# Allegro board interconnect_v1.brd
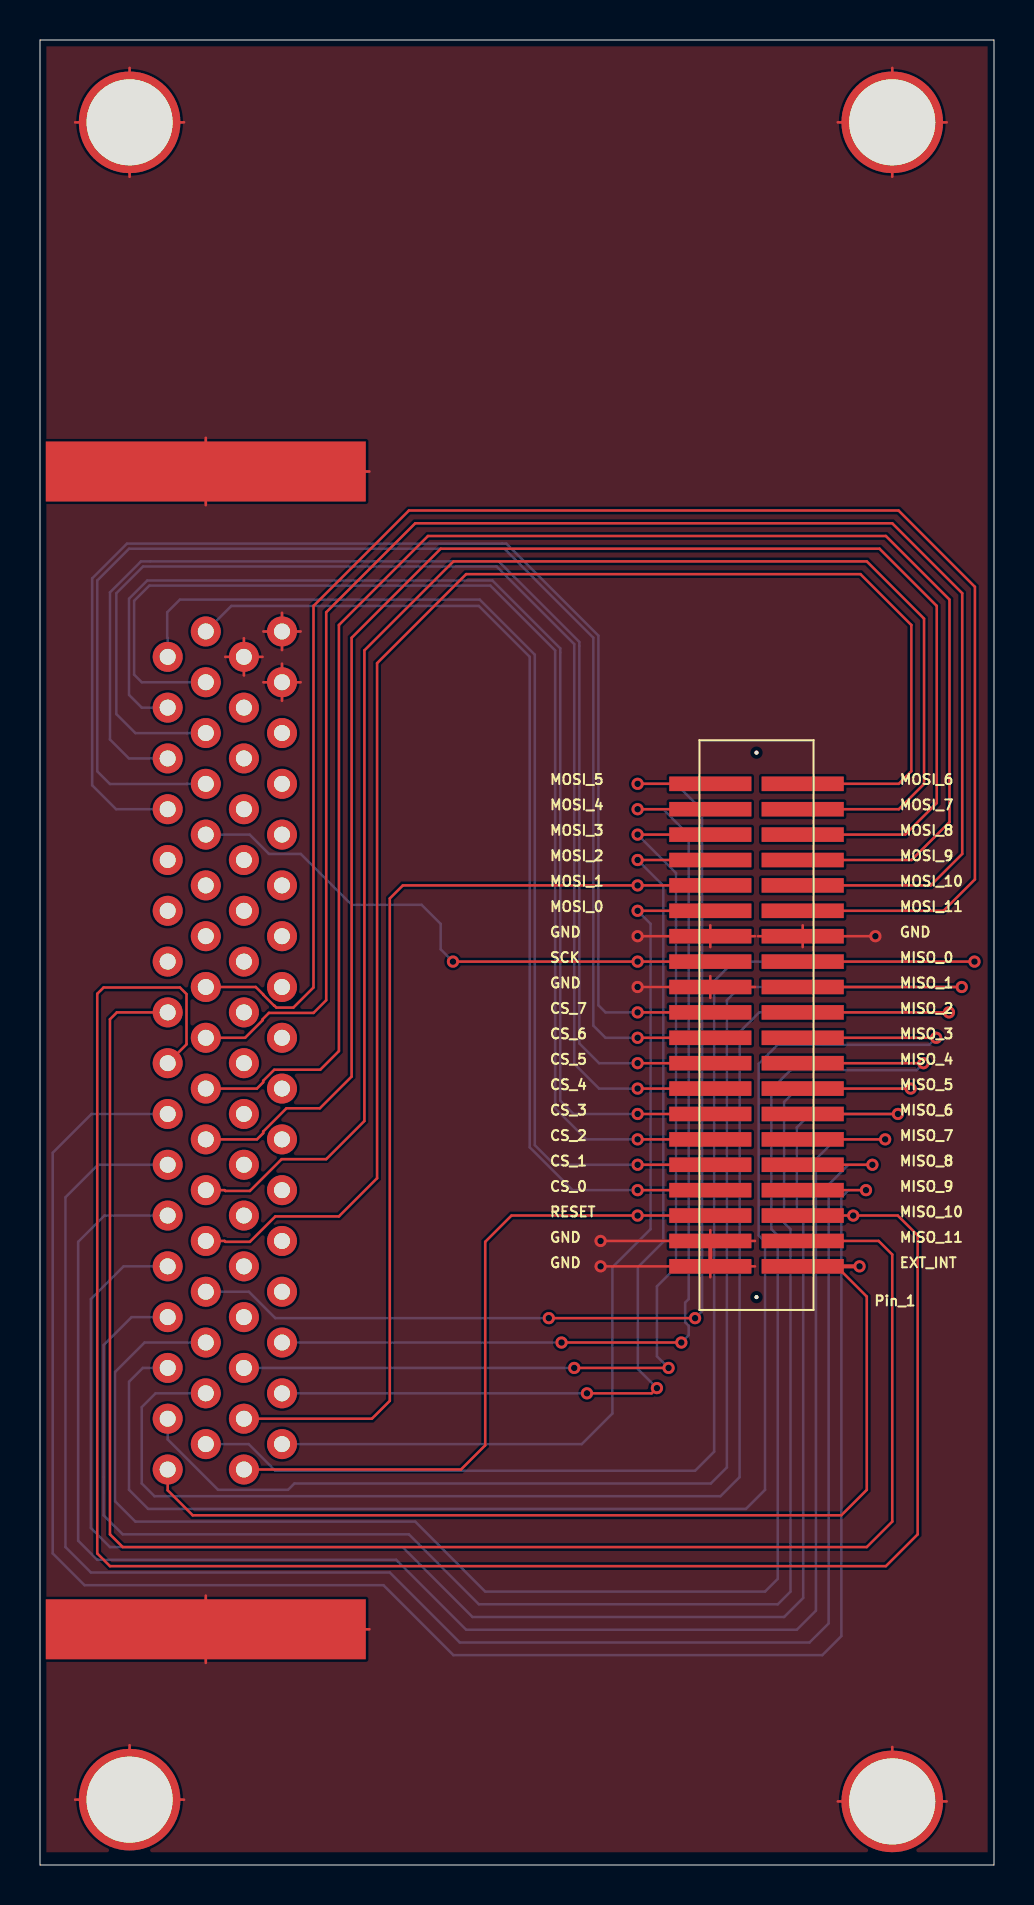
[diagram p0: board, top side]
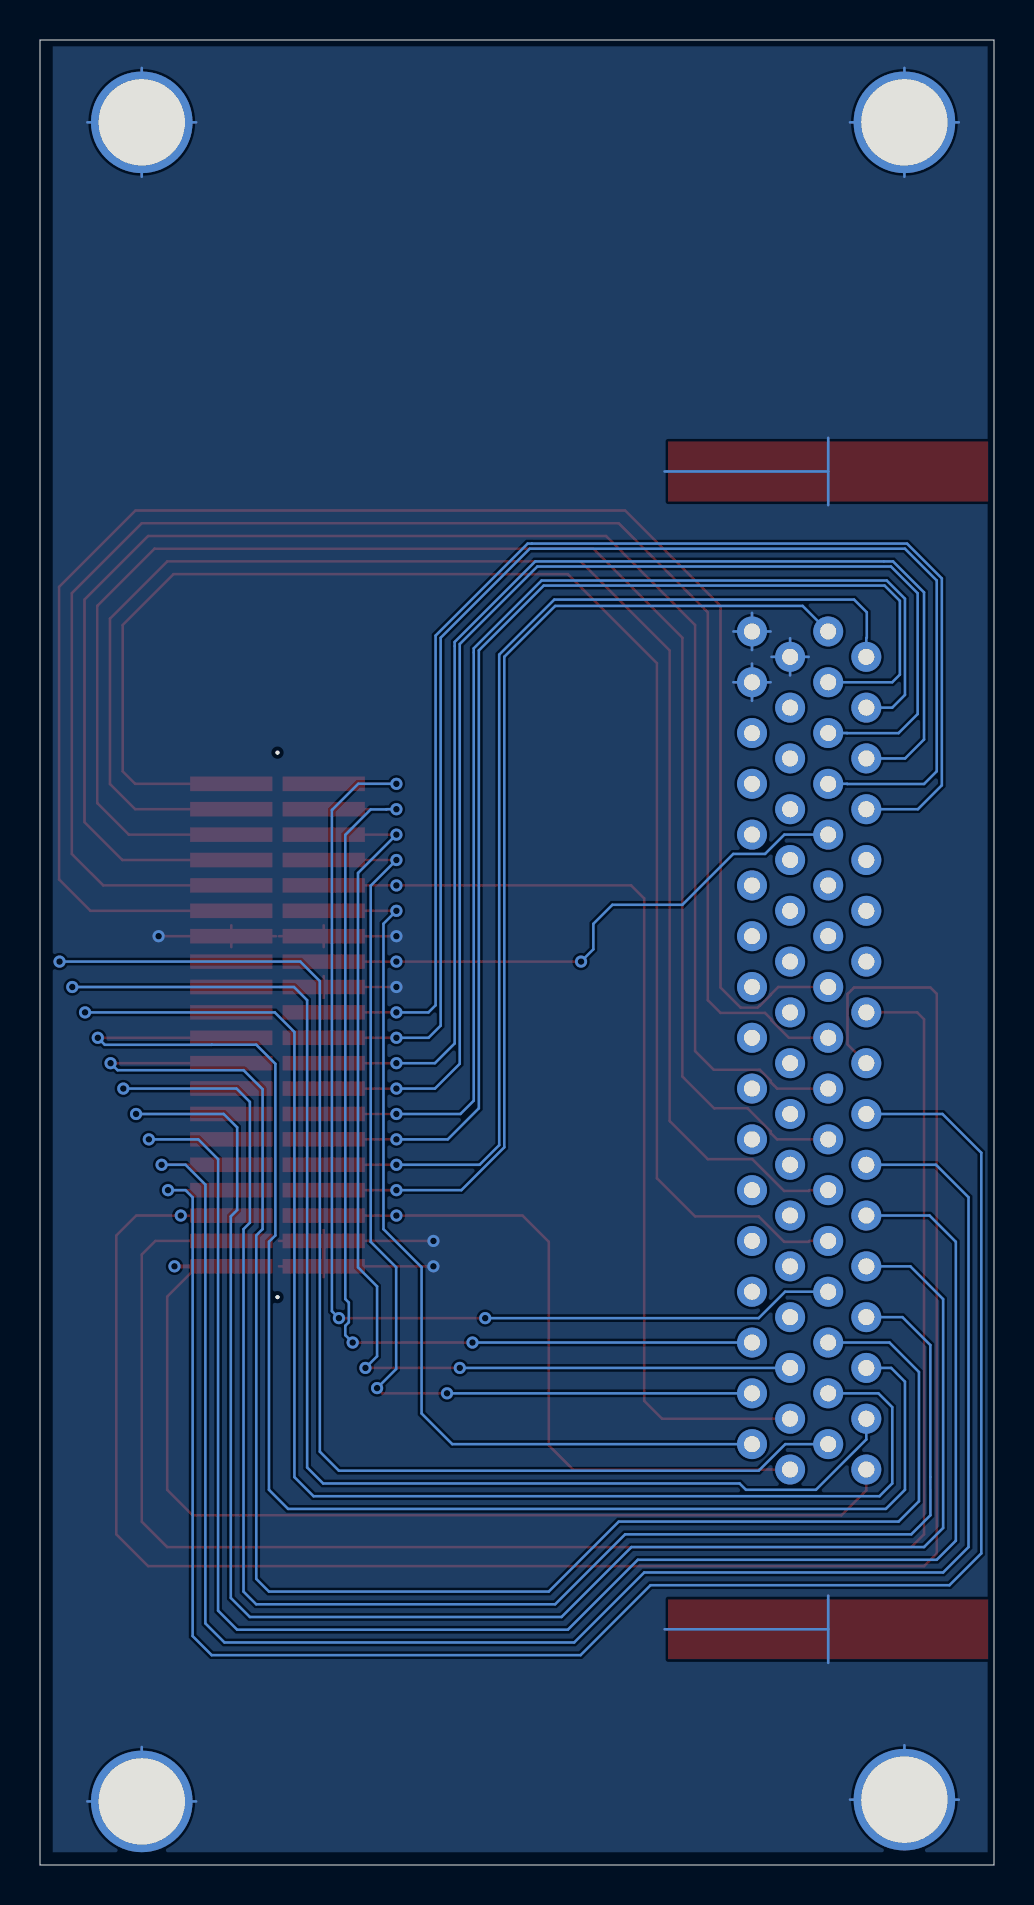
[diagram p1: board, bottom side, seen from below]

Outline 47.7 x 91.27 mm; copper layers: TOP, BOTTOM. Coordinates in mm from the lower left corner of the outline.
Outline path: 0,91.27 47.7,91.27 47.7,0 0,0 0,91.27

## Design rules (mm)
constraint set DEFAULT: min track width 0.127

## Placement (name value [footprint] x y rotation side)
J25  CONN 34x2  [DB68]  12.1 61.69 0 top
J26  A35051-ND (68pin, 1.27mm pitch, Through hold, A113405-ND)  [SMV_2X20]  38.14 29.94 180 top
M3  TEST POINT  [8-32]  4.48 87.15 0 top
M4  TEST POINT  [8-32]  42.61 87.15 0 top
M5  TEST POINT  [8-32]  42.61 3.18 0 top
M6  TEST POINT  [8-32]  4.48 3.27 0 top

## Library data of the parts
J25 = CONN PLUG 34x2_1
J26 = HEADER 34x2_1
M3-M6 = TEST POINT

## Footprints (pads in the part's own frame, mm; a bottom-side part is the same pattern mirrored in y, then rotated)
8-32
  round 5.08 hole 4.305: 1(0,0)
DB68
  round 1.5 hole 0.8: 1(0,0) 2(-1.905,-1.27) 3(0,-2.54) 4(-1.905,-3.81) 5(0,-5.08) 6(-1.905,-6.35) 7(0,-7.62) 8(-1.905,-8.89) 9(0,-10.16) 10(-1.905,-11.43) 11(0,-12.7) 12(-1.905,-13.97) 13(0,-15.24) 14(-1.905,-16.51) 15(0,-17.78) 16(-1.905,-19.05) 17(0,-20.32) 18(-1.905,-21.59) 19(0,-22.86) 20(-1.905,-24.13) 21(0,-25.4) 22(-1.905,-26.67) 23(0,-27.94) 24(-1.905,-29.21) 25(0,-30.48) 26(-1.905,-31.75) 27(0,-33.02) 28(-1.905,-34.29) 29(0,-35.56) 30(-1.905,-36.83) 31(0,-38.1) 32(-1.905,-39.37) 33(0,-40.64) 34(-1.905,-41.91) 35(-3.81,0) 36(-5.715,-1.27) 37(-3.81,-2.54) 38(-5.715,-3.81) 39(-3.81,-5.08) 40(-5.715,-6.35) 41(-3.81,-7.62) 42(-5.715,-8.89) 43(-3.81,-10.16) 44(-5.715,-11.43) 45(-3.81,-12.7) 46(-5.715,-13.97) 47(-3.81,-15.24) 48(-5.715,-16.51) 49(-3.81,-17.78) 50(-5.715,-19.05) 51(-3.81,-20.32) 52(-5.715,-21.59) 53(-3.81,-22.86) 54(-5.715,-24.13) 55(-3.81,-25.4) 56(-5.715,-26.67) 57(-3.81,-27.94) 58(-5.715,-29.21) 59(-3.81,-30.48) 60(-5.715,-31.75) 61(-3.81,-33.02) 62(-5.715,-34.29) 63(-3.81,-35.56) 64(-5.715,-36.83) 65(-3.81,-38.1) 66(-5.715,-39.37) 67(-3.81,-40.64) 68(-5.715,-41.91)
  rect 16x3 smd: 69(-3.81,8) 70(-3.81,-49.9)
SMV_2X20
  round 0.2 hole 0.2 unplated: (2.31,1.54) (2.31,-25.69)
  rect 4.11x0.73 smd: 1(0,0) 2(0,-1.27) 3(0,-2.54) 4(0,-3.81) 5(0,-5.08) 6(0,-6.35) 7(0,-7.62) 8(0,-8.89) 9(0,-10.16) 10(0,-11.43) 11(0,-12.7) 12(0,-13.97) 13(0,-15.24) 14(0,-16.51) 15(0,-17.78) 16(0,-19.05) 17(0,-20.32) 18(0,-21.59) 19(0,-22.86) 20(0,-24.13) 21(4.62,-24.13) 22(4.62,-22.86) 23(4.62,-21.59) 24(4.62,-20.32) 25(4.62,-19.05) 26(4.62,-17.78) 27(4.62,-16.51) 28(4.62,-15.24) 29(4.62,-13.97) 30(4.62,-12.7) 31(4.62,-11.43) 32(4.62,-10.16) 33(4.62,-8.89) 34(4.62,-7.62) 35(4.62,-6.35) 36(4.62,-5.08) 37(4.62,-3.81) 38(4.62,-2.54) 39(4.62,-1.27) 40(4.62,0)

## Nets
GND_SIGNAL: J25.1 J25.2 J25.3 J25.69 J25.70 J26.14 J26.27 J26.29 J26.39 J26.40 M3.1 M4.1 M5.1 M6.1
CS_IN_0: J25.35 J26.37
CS_IN_1: J25.36 J26.36
CS_IN_2: J25.37 J26.35
CS_IN_3: J25.38 J26.34
CS_IN_4: J25.39 J26.33
CS_IN_5: J25.40 J26.32
CS_IN_6: J25.41 J26.31
CS_IN_7: J25.42 J26.30
EXT_INT_IN: J25.68 J26.1
MISO_OUT_0: J25.67 J26.13
MISO_OUT_1: J25.66 J26.12
MISO_OUT_2: J25.65 J26.11
MISO_OUT_3: J25.64 J26.10
MISO_OUT_4: J25.63 J26.9
MISO_OUT_5: J25.62 J26.8
MISO_OUT_6: J25.60 J26.7
MISO_OUT_7: J25.58 J26.6
MISO_OUT_8: J25.56 J26.5
MISO_OUT_9: J25.54 J26.4
MISO_OUT_10: J25.52 J26.3
MISO_OUT_11: J25.50 J26.2
MOSI_IN_0: J25.33 J26.26
MOSI_IN_1: J25.32 J26.25
MOSI_IN_2: J25.31 J26.24
MOSI_IN_3: J25.30 J26.23
MOSI_IN_4: J25.29 J26.22
MOSI_IN_5: J25.61 J26.21
MOSI_IN_6: J25.59 J26.20
MOSI_IN_7: J25.57 J26.19
MOSI_IN_8: J25.55 J26.18
MOSI_IN_9: J25.53 J26.17
MOSI_IN_10: J25.51 J26.16
MOSI_IN_11: J25.49 J26.15
RESET_IN: J25.34 J26.38
SCK_IN_0: J25.43 J26.28

Pads without a net: J25 4 5 6 7 8 9 10 11 12 13 14 15 16 17 18 19 20 21 22 23 24 25 26 27 28 44 45 46 47 48

## Via types
v1: diameter 0.61, hole 0.33, TOP to BOTTOM, 42 vias

## Routing (per net, layer and track width the routed paths; a pad name or vN(x,y) marks a point on that pad's centre or on a via; arc(x,y) is an arc through that point)
GND_SIGNAL: length 183.4
  TOP w0.127: J26.29 33.52,44.45 ; J26.29 33.52,43.36 ; J26.29 35.75,43.91 ; J26.29 v1(29.88,43.91) ; 33.52,31.21 35.75,31.21 ; 33.52,31.21 33.52,31.75 ; 33.52,31.21 v1(28.03,31.21) 27.98,31.16 ; 35.9,46.45 J26.14 ; J26.14 38.14,45.9 ; J26.14 38.14,46.99 ; J26.14 v1(41.77,46.45) ; J26.27 33.52,46.99 ; J26.27 v1(29.88,46.45) ; J26.27 33.52,45.9 ; J26.27 35.75,46.45 ; v1(28.03,29.94) 33.52,29.94 ; 33.52,29.94 33.52,29.39 ; 33.52,29.94 35.75,29.94 ; 12.1,58.22 J25.3 ; J25.3 12.1,60.08 ; J25.3 11.17,59.15 ; J25.3 13.03,59.15 ; 11.17,61.69 J25.1 ; J25.1 12.1,62.62 ; J25.1 12.1,60.76 ; J25.1 13.03,61.69 ; M4.1 42.61,89.87 ; M4.1 45.33,87.15 ; M4.1 42.61,84.43 ; M4.1 39.89,87.15 ; M6.1 4.48,5.99 ; M6.1 1.76,3.27 ; M6.1 7.2,3.27 ; 10.2,59.49 J25.2 ; J25.2 10.2,61.35 ; J25.2 9.27,60.42 ; J25.2 11.13,60.42 ; 1.76,87.15 M3.1 ; M3.1 4.48,84.43 ; M3.1 7.2,87.15 ; M3.1 4.48,89.87 ; J25.70 8.29,13.47 ; J25.70 16.47,11.79 ; J25.70 8.29,10.11 ; 39.89,3.18 M5.1 ; M5.1 42.61,5.9 ; M5.1 45.33,3.18 ; 8.29,68.01 J25.69 ; J25.69 8.29,71.37 ; J25.69 16.47,69.69
  TOP w0.2: 33.52,29.94 33.52,31.21
  BOTTOM w0.127: M3.1 4.48,89.87 ; M3.1 4.48,84.43 ; M3.1 7.2,87.15 ; M3.1 1.76,87.15 ; 11.17,59.15 J25.3 ; J25.3 12.1,60.08 ; J25.3 12.1,58.22 ; J25.3 13.03,59.15 ; M4.1 45.33,87.15 ; M4.1 39.89,87.15 ; M4.1 42.61,84.43 ; M4.1 42.61,89.87 ; v1(28.03,29.94) 27.98,29.89 ; M5.1 45.33,3.18 ; M5.1 39.89,3.18 ; M5.1 42.61,5.9 ; 1.76,3.27 M6.1 ; M6.1 7.2,3.27 ; M6.1 4.48,5.99 ; J25.69 8.29,71.37 ; J25.69 16.47,69.69 ; J25.69 8.29,68.01 ; J25.70 16.47,11.79 ; J25.70 8.29,10.11 ; J25.70 8.29,13.47 ; J25.2 11.13,60.42 ; J25.2 9.27,60.42 ; J25.2 10.2,59.49 ; J25.2 10.2,61.35 ; J25.1 12.1,62.62 ; J25.1 11.17,61.69 ; J25.1 13.03,61.69 ; J25.1 12.1,60.76
CS_IN_0: length 52.2
  TOP w0.127: 33.52,33.75 v1(29.88,33.75)
  BOTTOM w0.127: J25.35 9.57,62.96 21.94,62.96 24.49,60.42 24.49,35.89 26.63,33.75 v1(29.88,33.75)
CS_IN_1: length 55.7
  TOP w0.127: 33.52,35.02 v1(29.88,35.02)
  BOTTOM w0.127: v1(29.88,35.02) 25.72,35.02 24.74,36 24.74,60.53 21.98,63.28 7,63.28 6.36,62.65 6.36,61.38 6.39,61.36 J25.36
CS_IN_2: length 61.4
  TOP w0.127: 33.52,36.29 v1(29.88,36.29)
  BOTTOM w0.127: J25.37 5.09,59.15 4.71,59.53 4.71,63.22 5.47,63.98 22.51,63.98 25.76,60.74 25.76,37.84 27.31,36.29 v1(29.88,36.29)
CS_IN_3: length 60.7
  TOP w0.127: J26.34 v1(29.88,37.56)
  BOTTOM w0.127: v1(29.88,37.56) 26.68,37.56 26.01,38.22 26.01,60.63 26.01,60.84 22.62,64.24 5.36,64.24 4.45,63.32 4.45,58.51 5.09,57.88 J25.38
CS_IN_4: length 64.3
  TOP w0.127: J26.33 v1(29.88,38.83)
  BOTTOM w0.127: J25.39 7.35,56.61 7.35,56.6 4.77,56.6 3.82,57.56 3.82,63.6 5.15,64.94 22.83,64.94 26.71,61.06 26.71,40.07 27.95,38.83 v1(29.88,38.83)
CS_IN_5: length 63.4
  TOP w0.127: J26.32 v1(29.88,40.1)
  BOTTOM w0.127: J25.40 4.45,55.34 3.5,56.29 3.5,63.64 5.05,65.19 5.51,65.19 22.94,65.19 26.97,61.16 26.97,60.95 26.97,41.09 27.95,40.1 v1(29.88,40.1)
CS_IN_6: length 68
  TOP w0.127: J26.31 v1(29.88,41.37)
  BOTTOM w0.127: J25.41 7.35,54.07 7.34,54.06 3.5,54.06 2.86,54.7 2.86,64.24 4.45,65.83 23.21,65.83 27.67,61.37 27.67,41.98 28.27,41.37 v1(29.88,41.37)
CS_IN_7: length 66.8
  TOP w0.127: J26.30 v1(29.88,42.64)
  BOTTOM w0.127: v1(29.88,42.64) 28.28,42.64 27.92,42.99 27.92,61.48 23.32,66.08 23.11,66.08 4.35,66.08 2.61,64.34 2.61,54 3.81,52.8 J25.42
EXT_INT_IN: length 51.7
  TOP w0.127: 39.83,29.94 41.34,28.42 41.34,18.76 40.07,17.49 7.63,17.49 6.39,18.74 J25.68
  TOP w0.2: v1(40.98,29.94) J26.1
MISO_OUT_0: length 71.9
  TOP w0.127: J26.13 v1(46.72,45.18)
  BOTTOM w0.127: v1(46.72,45.18) 34.68,45.18 33.71,44.2 33.71,20.67 32.75,19.72 11.77,19.72 10.43,21.05 J25.67
MISO_OUT_1: length 73.8
  TOP w0.127: J26.12 v1(46.09,43.91)
  BOTTOM w0.127: v1(46.09,43.91) 35,43.91 34.34,43.25 34.34,19.88 33.54,19.08 12.72,19.08 12.4,18.76 8.9,18.76 6.39,21.28 J25.66
MISO_OUT_2: length 78.3
  TOP w0.127: J26.11 v1(45.45,42.64)
  BOTTOM w0.127: v1(45.45,42.64) 35.96,42.64 34.98,41.66 34.98,19.4 34.03,18.44 5.72,18.44 5.09,19.08 5.09,22.9 5.78,23.59 J25.65
MISO_OUT_3: length 77.7
  TOP w0.127: J26.10 v1(44.81,41.37)
  BOTTOM w0.127: J25.64 5.14,24.86 4.45,24.17 4.45,18.76 5.41,17.81 35.3,17.81 36.25,18.76 36.25,31.16 35.93,31.48 35.93,40.07 36.89,41.02 39.11,41.02 39.11,41.02 44.46,41.02 v1(44.81,41.37)
MISO_OUT_4: length 85.7
  TOP w0.127: J26.9 v1(44.17,40.1)
  BOTTOM w0.127: J25.63 5.23,26.13 3.75,24.65 3.75,18.19 4.77,17.17 18.76,17.17 22.26,13.67 36.25,13.67 36.89,14.31 36.89,31.48 36.57,31.8 36.57,38.8 37.52,39.75 43.82,39.75 v1(44.17,40.1)
MISO_OUT_5: length 85.4
  TOP w0.127: J26.8 v1(43.53,38.83)
  BOTTOM w0.127: v1(43.53,38.83) 37.87,38.83 37.21,38.16 37.21,32.12 37.52,31.8 37.52,13.67 36.89,13.04 21.94,13.04 18.45,16.54 4.13,16.54 3.18,17.49 3.18,19.4 3.18,26 4.58,27.4 J25.62
MISO_OUT_6: length 87.6
  TOP w0.127: J26.7 v1(42.9,37.56)
  BOTTOM w0.127: v1(42.9,37.56) 38.51,37.56 37.84,36.89 37.84,32.75 38.16,32.44 38.16,13.36 37.21,12.4 21.62,12.4 18.13,15.9 3.5,15.9 2.54,16.85 2.54,28.3 4.18,29.94 J25.60
MISO_OUT_7: length 89.7
  TOP w0.127: J26.6 v1(42.26,36.29)
  BOTTOM w0.127: v1(42.26,36.29) 39.79,36.29 38.8,35.3 38.8,12.72 37.84,11.77 21.31,11.77 17.81,15.26 2.86,15.26 1.91,16.22 1.91,31.16 3.22,32.48 J25.58
MISO_OUT_8: length 91.8
  TOP w0.127: J26.5 v1(41.62,35.02)
  BOTTOM w0.127: v1(41.62,35.02) 40.42,35.02 39.43,34.03 39.43,12.08 38.48,11.13 20.99,11.13 17.49,14.63 2.54,14.63 1.27,15.9 1.27,33.39 2.9,35.02 J25.56
MISO_OUT_9: length 95
  TOP w0.127: J26.4 v1(41.3,33.75)
  BOTTOM w0.127: v1(41.3,33.75) 40.43,33.75 40.07,33.39 40.07,11.45 39.11,10.49 20.67,10.49 17.17,13.99 2.23,13.99 0.64,15.58 0.64,35.62 2.58,37.56 J25.54
MISO_OUT_10: length 99.6
  TOP w0.127: J26.3 v1(40.66,32.48) 42.89,32.48 43.88,31.48 43.88,16.54 42.29,14.95 3.5,14.95 2.86,15.58 2.86,43.57 3.18,43.88 7,43.88 7.33,43.55 7.33,41.04 J25.52
MISO_OUT_11: length 86.8
  TOP w0.127: J26.2 41.93,31.21 42.61,30.53 42.61,17.17 41.34,15.9 4.13,15.9 3.5,16.54 3.5,42.3 3.84,42.64 J25.50
MOSI_IN_0: length 47
  TOP w0.127: J26.26 v1(29.88,47.72)
  BOTTOM w0.127: J25.33 27.09,21.05 28.62,22.58 28.62,29.89 30.53,31.8 30.53,47.07 v1(29.88,47.72)
MOSI_IN_1: length 49.1
  TOP w0.127: J26.25 v1(29.88,48.99) 18.14,48.99 17.49,48.34 17.49,23.21 16.6,22.32 J25.32
MOSI_IN_2: length 50.4
  TOP w0.127: v1(30.85,23.85) 30.58,23.59 v1(27.35,23.59) ; J26.24 v1(29.88,50.26)
  BOTTOM w0.127: v1(30.85,23.85) 29.89,24.8 29.89,29.89 31.16,31.16 31.16,48.97 v1(29.88,50.26) ; J25.31 v1(27.35,23.59)
MOSI_IN_3: length 53
  TOP w0.127: J26.23 v1(29.88,51.53) ; v1(26.71,24.86) v1(31.43,24.86)
  BOTTOM w0.127: v1(29.88,51.53) 31.8,49.61 31.8,29.89 30.85,28.94 30.85,25.44 v1(31.43,24.86) ; J25.30 v1(26.71,24.86)
MOSI_IN_4: length 52.4
  TOP w0.127: J26.22 v1(29.88,52.8) ; v1(26.08,26.13) v1(32.07,26.13)
  BOTTOM w0.127: v1(29.88,52.8) 30.38,52.8 30.39,52.79 31.16,52.79 32.44,51.52 32.44,28.3 32.26,28.13 32.26,27.14 32.44,26.97 32.44,26.5 v1(32.07,26.13) ; J25.29 v1(26.08,26.13)
MOSI_IN_5: length 58
  TOP w0.127: v1(25.44,27.35) v1(32.75,27.35) ; J26.21 v1(29.88,54.07)
  BOTTOM w0.127: v1(25.44,27.35) 11.77,27.35 10.45,28.67 J25.61 ; v1(32.75,27.35) 33.11,27.7 33.11,52.76 31.79,54.07 v1(29.88,54.07)
MOSI_IN_6: length 78.3
  TOP w0.127: J26.20 42.94,54.07 43.57,54.7 43.57,62.01 41.02,64.55 21.31,64.55 16.85,60.1 16.85,34.34 14.95,32.44 11.77,32.44 10.49,31.16 9.28,31.16 9.23,31.21 J25.59
MOSI_IN_7: length 78.8
  TOP w0.127: J26.19 42.94,52.8 44.2,54.06 44.2,62.33 41.34,65.19 20.67,65.19 16.22,60.74 16.22,37.21 14.31,35.3 12.08,35.3 10.49,33.71 9.27,33.71 9.23,33.75 J25.57
MOSI_IN_8: length 80.1
  TOP w0.127: J25.55 10.85,36.29 11.16,36.6 11.16,36.68 12.32,37.84 13.99,37.84 15.58,39.43 15.58,61.37 20.03,65.83 41.98,65.83 44.84,62.96 44.84,53.11 43.26,51.53 J26.18
MOSI_IN_9: length 81.7
  TOP w0.127: J26.17 43.58,50.26 45.47,52.15 45.47,63.28 42.29,66.46 19.4,66.46 14.95,62.01 14.95,40.7 14.01,39.77 11.71,39.77 11.16,39.22 11.16,39.14 10.84,38.83 J25.53
MOSI_IN_10: length 83
  TOP w0.127: J26.16 44.54,48.99 46.11,50.56 46.11,63.6 42.61,67.1 18.76,67.1 14.31,62.65 14.31,43.25 13.67,42.61 11.45,42.61 11.14,42.3 11.14,42.25 10.26,41.37 J25.51
MOSI_IN_11: length 85.8
  TOP w0.127: J26.15 45.17,47.72 46.75,49.29 46.75,63.92 42.93,67.73 18.44,67.73 13.67,62.96 13.67,43.88 12.67,42.88 11.82,42.88 11.73,42.97 11.71,42.97 11.16,43.52 11.16,43.54 10.79,43.91 J25.49
RESET_IN: length 34.5
  TOP w0.127: J25.34 21.05,19.78 22.26,20.99 22.26,31.16 23.57,32.48 v1(29.88,32.48) 33.52,32.48
SCK_IN_0: length 28.6
  TOP w0.127: J26.28 v1(29.88,45.18) v1(20.65,45.18)
  BOTTOM w0.127: v1(20.65,45.18) 20.03,45.79 20.03,47.06 19.08,48.02 15.58,48.02 13.04,50.56 11.45,50.56 10.48,51.53 J25.43

## Copper pours and planes (outline as drawn; the poured copper is in the pictures)
GND_SIGNAL on TOP: 0.32,90.95 0.32,0.64 47.38,0.64 47.38,90.95
GND_SIGNAL on BOTTOM: 0.32,90.95 0.32,0.64 47.06,0.64 47.06,90.95

## Text on the board
User.Comments: CS_0 | CS_1 | CS_2 | CS_3 | CS_4 | CS_5 | CS_6 | CS_7 | SCK | NC | MOSI_11 | MISO_11 | MOSI_10 | MISO_10 | MOSI_9 | MISO_9 | MOSI_8 | MISO_8 | MOSI_7 | MISO_7 | MOSI_6 | MISO_6 | MOSI_5 | MISO_5 | MISO_4 | MISO_2 | MISO_1 | MISO_0 | INT | 36 | 35 | 2 | 1 | GND | MOSI_4 | MOSI_3 | MOSI_2 | MOSI_0 | Reset
Ref Des/Silkscreen Top: MOSI_5 | MOSI_4 | MOSI_3 | MOSI_2 | MOSI_1 | MOSI_0 | GND | SCK | CS_7 | CS_6 | CS_5 | CS_4 | CS_3 | CS_2 | CS_1 | CS_0 | RESET | Pin_1 | MOSI_6 | MOSI_7 | MOSI_8 | MOSI_9 | MOSI_10 | MOSI_11 | MISO_0 | MISO_1 | MISO_2 | MISO_3 | MISO_4 | MISO_5 | MISO_6 | MISO_7 | MISO_8 | MISO_9 | MISO_10 | MISO_11 | EXT_INT
XSECTION_CHART: *  SURFACE - AIR 0 MM | L1 TOP CONDUCTOR - COPPER 0.03 MM | *  DIELECTRIC - FR-4 0.203 MM | L2 BOTTOM CONDUCTOR - COPPER 0.03 MM | DESIGN CROSS SECTION CHART | ___________________________ | 1-2 | FIGURE | FINISHED_SIZE | 0.33 | 0.8 | 4.305 | 0.2 | DRILL CHART: TOP to BOTTOM | ALL UNITS ARE IN MILLIMETERS | PLATED | NON-PLATED | QTY | 42 | 68 | 4 | 2 | 116 | TOTAL HOLES:
